# Altium PCB PCB2.PcbDoc
Units mm, origin at the board's own origin, x right, y up, seen from the top; angles counter-clockwise.
Board outline 17.78 x 26.67 mm, 2 copper layers (Top Layer, Bottom Layer); 11 components, 11 nets, 22 pads, 0 vias.
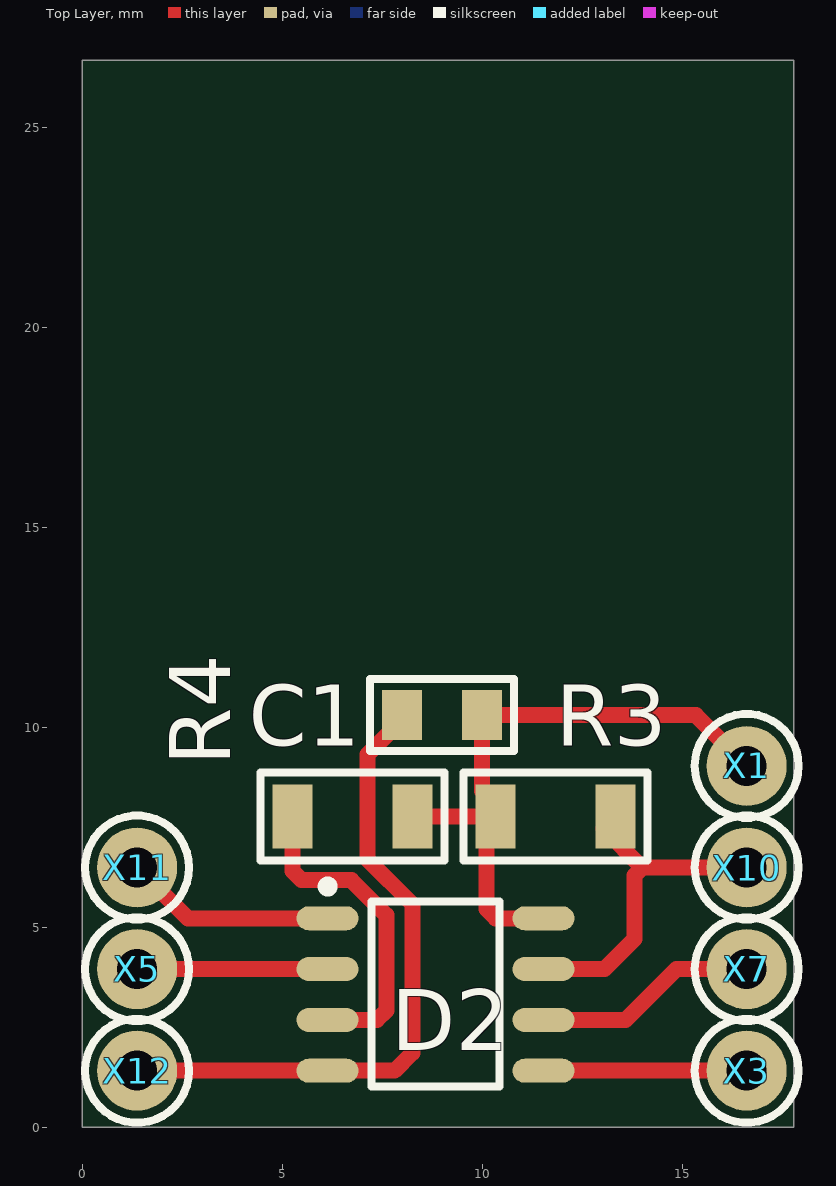
[diagram p0: Top Layer view]
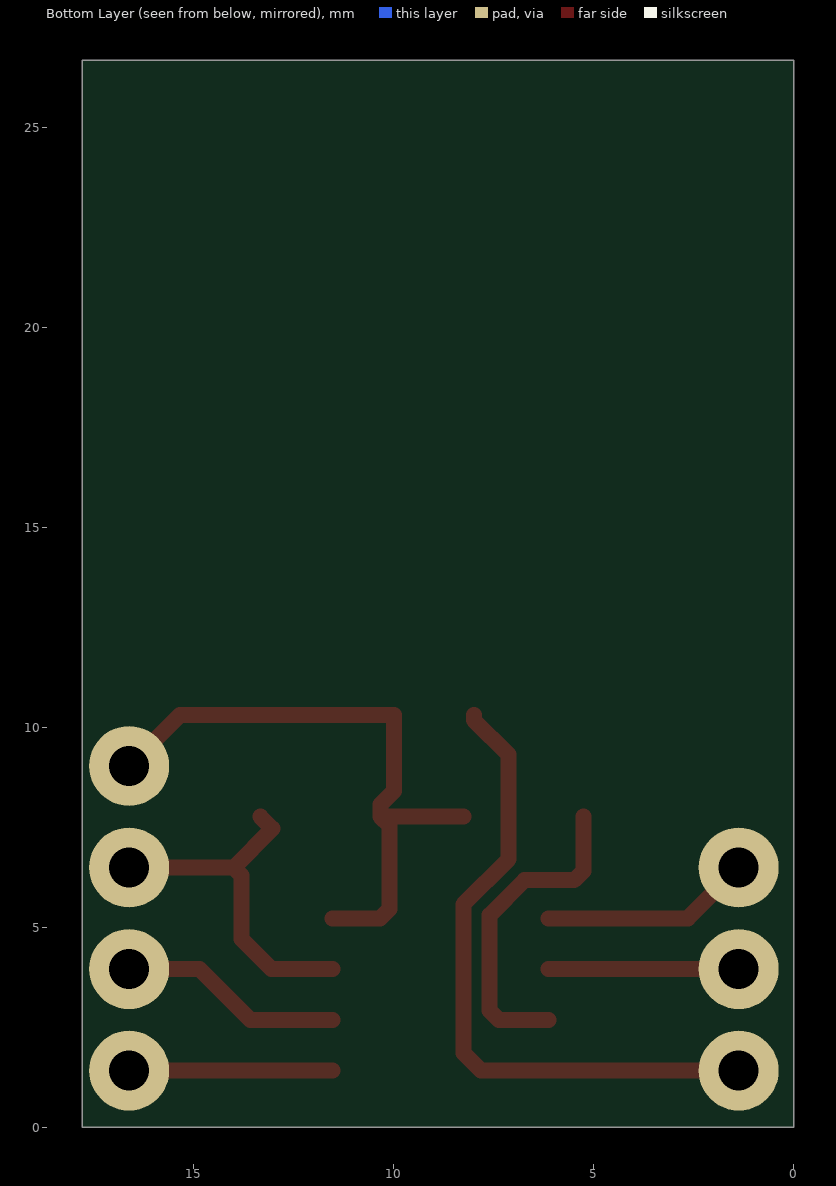
[diagram p1: Bottom Layer view, seen from below]
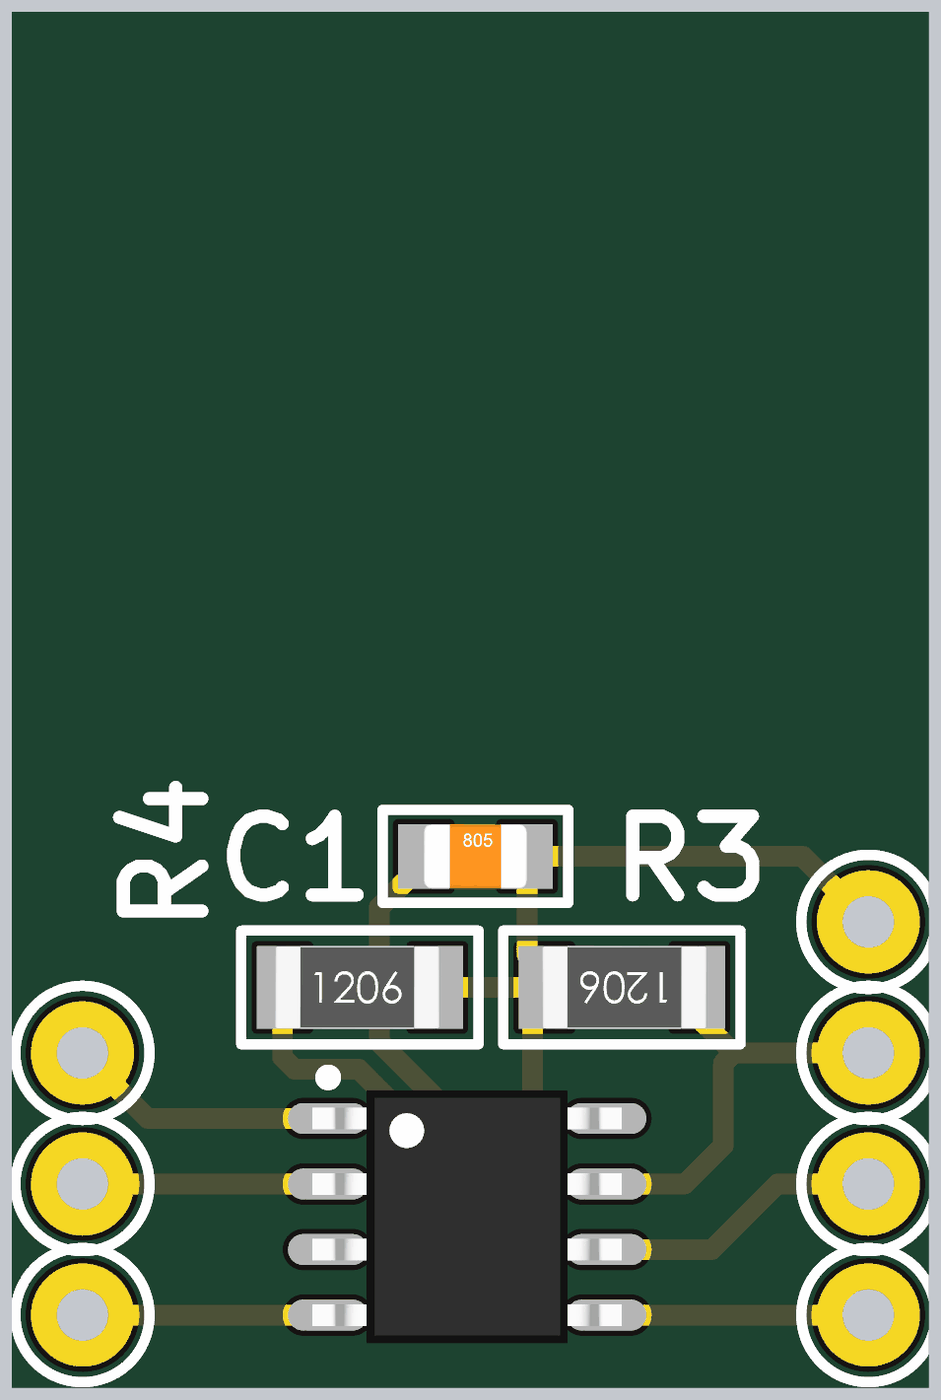
[diagram p2: 3D render of the assembled board from above, using the file's embedded part models]

## Layer stack, top to bottom
Top Solder: solder mask 0.0102, Solder Resist, Dk 3.5
Top Layer: signal copper 0.0356
Dielectric 1: dielectric 0.32, FR-4, Dk 4.8
Bottom Layer: signal copper 0.0356
Bottom Solder: solder mask 0.0102, Solder Resist, Dk 3.5

## Board outline
0,0 17.78,0 17.78,26.67 0,26.67

## Design rules (kind name [scope] priority, off if disabled: settings)
Clearance [All] p1: gap=0.254 ignorepadtopadclearanceinfootprint=FALSE except(0: Arc-Hole Track-Hole SMDPad-Hole THPad-Hole Via-Hole Fill-Hole Poly-Hole Region-Hole Text-Hole)
PolygonConnect [All] p1: connectstyle=Relief reliefconductorwidth=0.254 reliefentries=4 polygonreliefangle="90 Angle" airgapwidth=0.254
RoutingVias [All] p1: holewidth=0.711 width=1.27 viastyle="Through Hole" minholewidth=0.711 minwidth=1.27 maxholewidth=0.711 maxwidth=1.27
SolderMaskExpansion [All] p1: expansion=0.102 istentingtop=FALSE
Width [All] p1: maxlimit=1 minlimit=0.254 preferedwidth=0.4
30 further rules are at their usual default settings.

## Components (designator, comment, footprint, x,y, rotation, side; value= is the part's Value field where it differs from the comment)
C1 "0.1u, 6.3V" CH0805C 8.99,10.3 r0 top
D2 "FM25L16B" 8-SOIC 8.83,3.315 r0 top
R3 "10 кОм" CH1206R 11.83,7.76 r180 top
R4 "10 кОм" CH1206R 6.75,7.76 r0 top
X1 "*" "CON: PADS 1x1mm" 16.61,9.03 r270 top
X3 "*" "CON: PADS 1x1mm" 16.61,1.41 r0 top
X5 "*" "CON: PADS 1x1mm" 1.37,3.95 r0 top
X7 "*" "CON: PADS 1x1mm" 16.61,3.95 r0 top
X10 "*" "CON: PADS 1x1mm" 16.61,6.49 r0 top
X11 "*" "CON: PADS 1x1mm" 1.37,6.49 r0 top
X12 "*" "CON: PADS 1x1mm" 1.37,1.41 r0 top

## Footprints (in the part's own frame and the unit in brackets; to place one, negate y for a bottom-side part, rotate by r counter-clockwise, add the part's x,y. Pads: shape width x height; smd on the part's side, far side on the other; paste and mask are expansions set on the pad)
8-SOIC [mm]
  rrect100% 1.55x0.6 smd: 1(-2.7,1.905) 2(-2.7,0.635) 3(-2.7,-0.635) 4(-2.7,-1.905) 5(2.7,-1.905) 6(2.7,-0.635) 7(2.7,0.635) 8(2.7,1.905)
  round 0.7 on Mech1: 28(-2.395,1.8)
  silkscreen extent -2.82,-2.3 1.61,2.82, body extent -3,-2.45 3,2.45, height 1.75
CH0805C [mm] "Chip Capacitor, 2-Leads, Body 2,00x1,20mm, IPC Medium Density"
  rect 1x1.25 smd: 1(-1,0) 2(1,0)
  silkscreen extent -1.8,-0.9 1.8,0.9, body extent -1,-0.62 1,0.63, height 0.78
CH1206R [mm] "Chip Resistor, 2-Leads, Body 3,0x1,5mm, IPC Low Density"
  rect 1x1.6 smd: 1(-1.5,0) 2(1.5,0)
  silkscreen extent -2.3,-1.1 2.3,1.1, body extent -1.65,-0.8 1.55,0.8, height 0.47
"CON: PADS 1x1mm" [mm]
  round 2 hole 1: 1(0,0)
  silkscreen extent -1.3,-1.3 1.3,1.3

## Part data
C1: library part Capacitor
D2: library part W25Q80JVSSIQ, "Flash", Manufacturer="Winbond Electronics", ComponentKind=8-SOIC, HelpURL=https://www.digikey.com/product-detail/en/winbond-electronics/W25Q80JVSSIQ/W25Q80JVSSIQ-ND/6193772, Model=W25Q80JVSSIQ
R3 R4: library part Resistor, "0603"
X1 X3 X5 X7 X10 X11 X12: library part 1-Connector

## Nets (pads, with @x,y where several pads share a name; then routed paths per layer and width w, separated by ;. In a path a pad name is that pad's centre, name@x,y a point inside that pad or via, vN(x,y) a via of type N, cw(c..) or ccw(c..) an arc to the next point about the centre after c; other vN are vias at no path point)
+3.3V: C1.2 D2.8 R3.2 R4.2 X1.1 | length 15.8
  Top Layer w0.4: R4.2 R3.2 ; D2.8 10.334,5.22 10.1,5.454 10.1,7.53 R3.2 ; X1.1 15.34,10.3 C1.2 9.99,8.4 10.33,8.06 R3.2
FRAM_CS: 
GND: C1.1 D2.4 X12.1 | length 16.3
  Top Layer w0.4: X12.1 D2.4 7.81,1.41 8.254,1.854 8.254,5.571 7.124,6.701 7.124,9.309 7.99,10.175 C1.1
MEM_CLK: D2.6 X7.1 | length 5.6
  Top Layer w0.4: D2.6 13.58,2.68 14.85,3.95 X7.1
MEM_CS: D2.1 X11.1 | length 5.3
  Top Layer w0.4: X11.1 2.64,5.22 D2.1
MEM_MISO: D2.2 X5.1 | length 4.8
  Top Layer w0.4: X5.1 D2.2
MEM_MOSI: D2.5 X3.1 | length 5.1
  Top Layer w0.4: D2.5 X3.1
MEM_RST: D2.7 R3.1 X10.1 | length 8.9
  Top Layer w0.4: D2.7 13.05,3.95 13.8,4.7 13.8,6.29 14,6.49 ; R3.1 13.03,7.46 14,6.49 ; X10.1 14,6.49
NetD1_3: 
NetD1_7: 
NetD2_3: D2.3 R4.1 | length 8.1
  Top Layer w0.4: R4.1 5.25,6.409 5.484,6.174 6.726,6.174 7.6,5.3 7.6,2.914 7.366,2.68 D2.3
pads on no net: D2.28